# Altium PCB PCB1.PcbDoc
Units mm, origin at the board's own origin, x right, y up, seen from the top; angles counter-clockwise.
Board outline 33.53 x 33.53 mm, 4 copper layers (Top Layer, Layer 1, Layer 2, Bottom Layer), stack 0.603 mm thick; 79 components, 50 nets, 254 pads, 63 vias.
Unrouted connection lines stored in the file: 60.
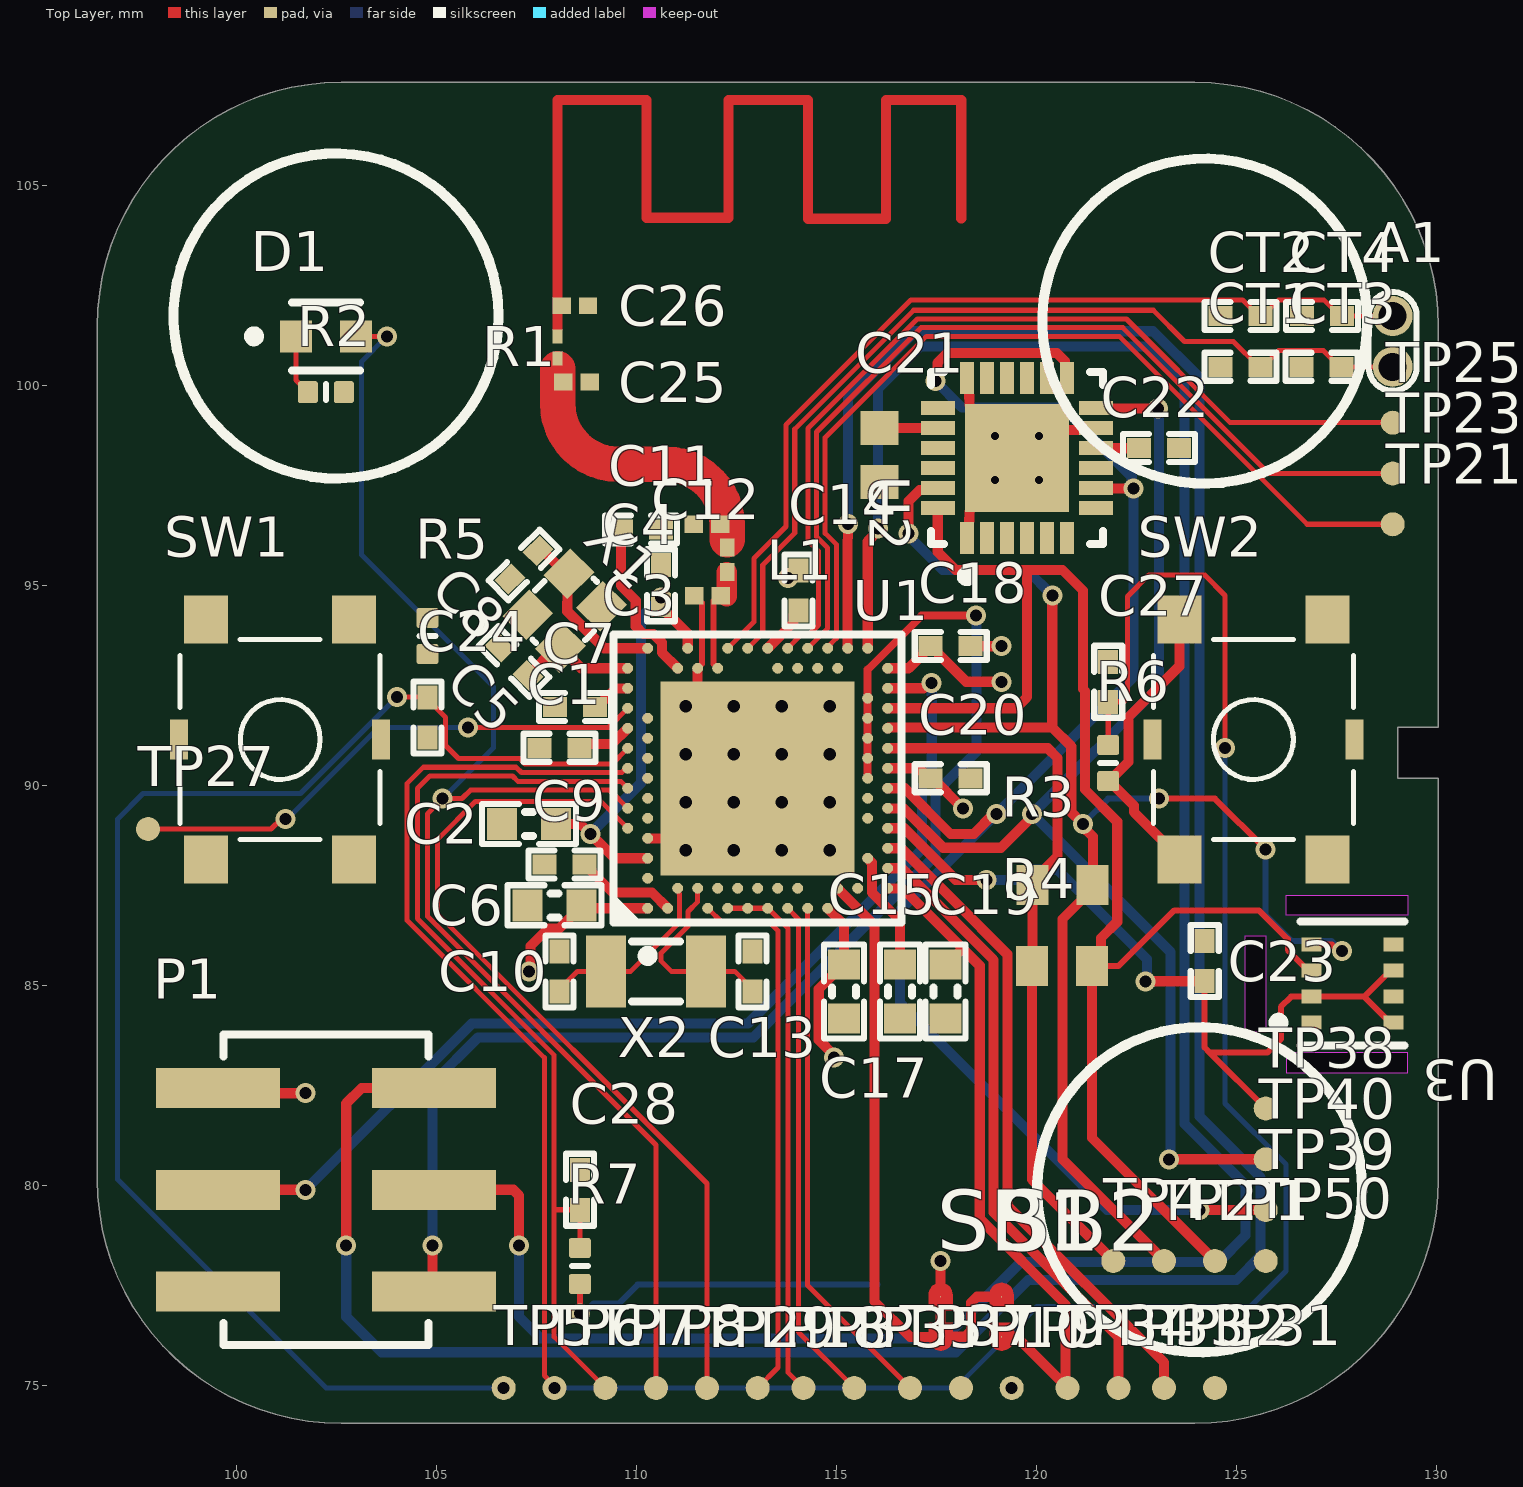
[diagram p0: Top Layer view]
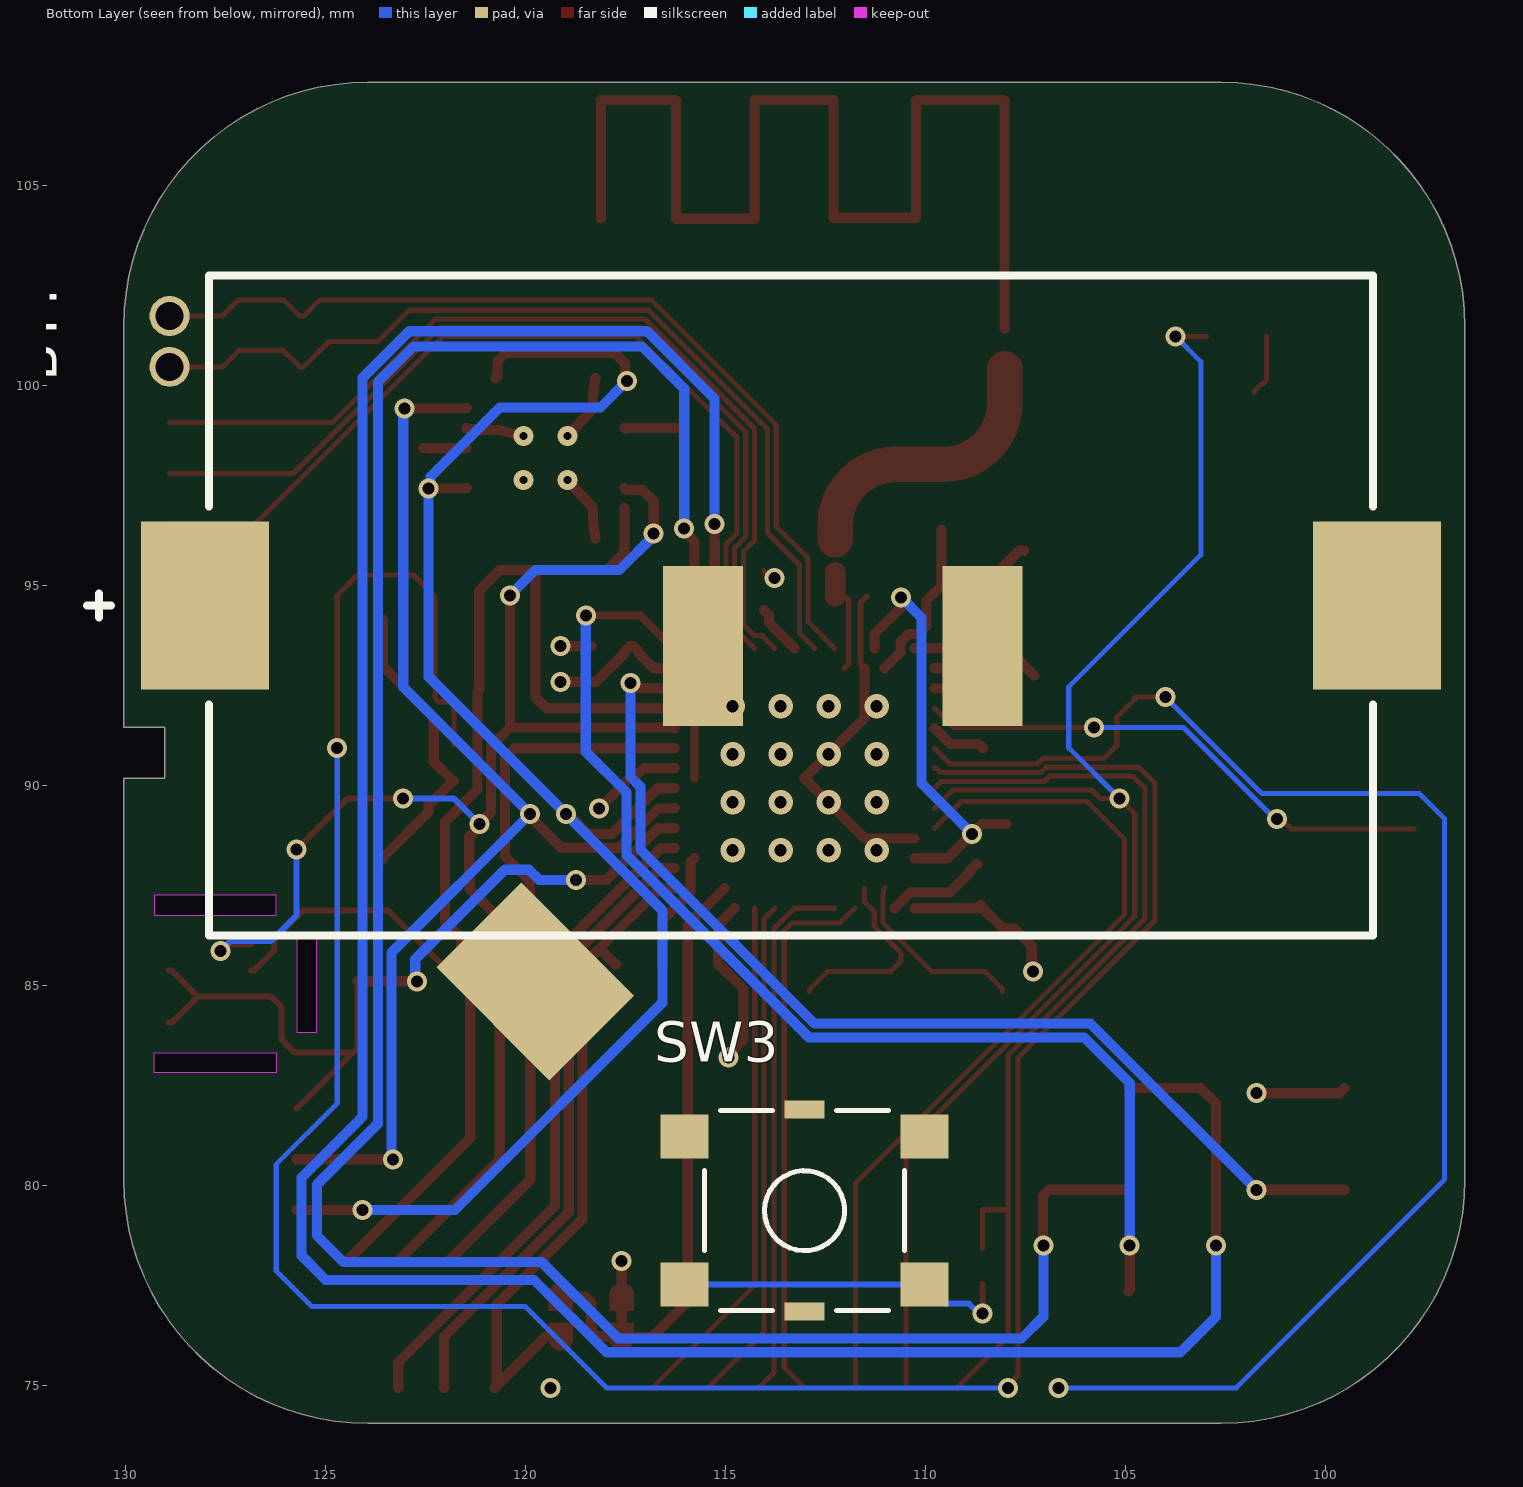
[diagram p1: Bottom Layer view, seen from below]
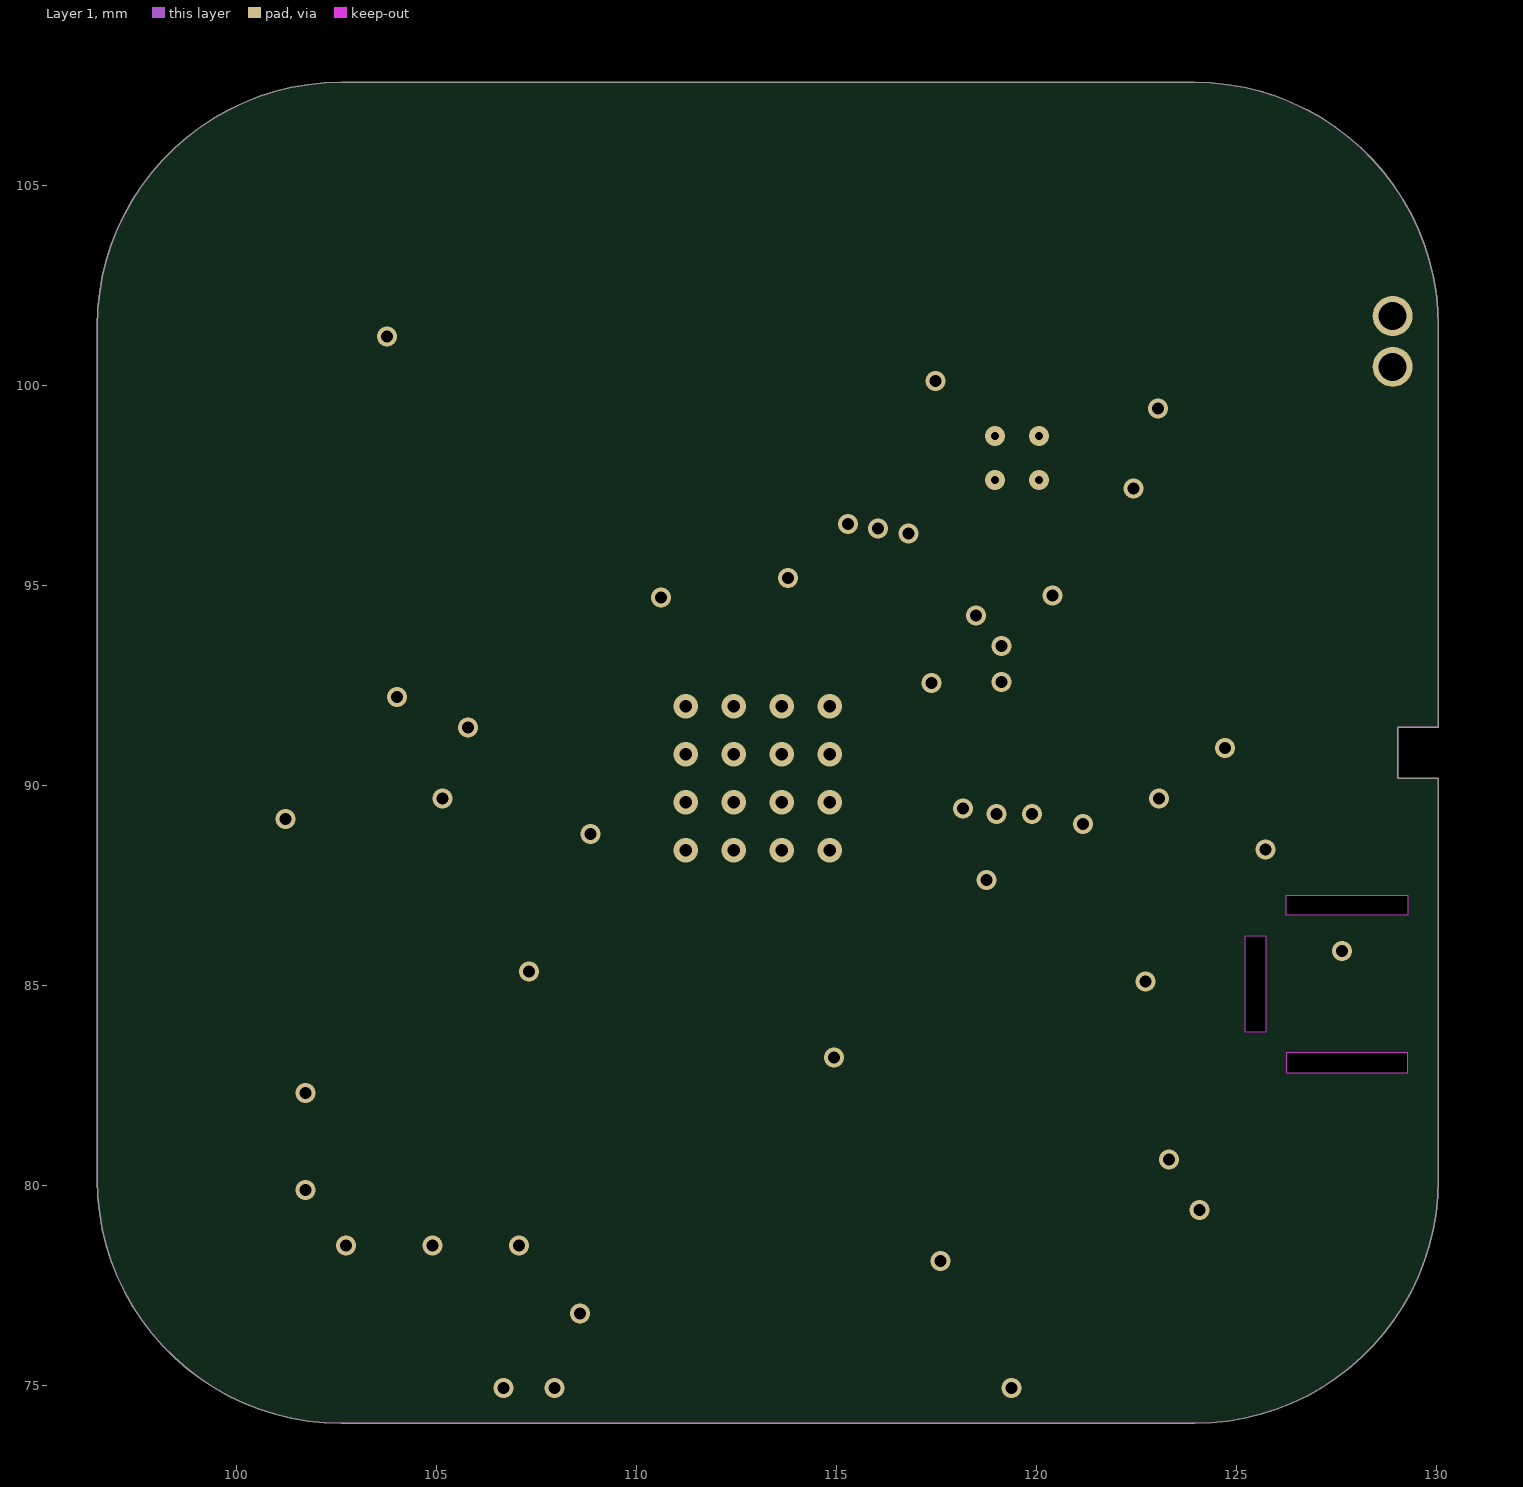
[diagram p2: Layer 1]
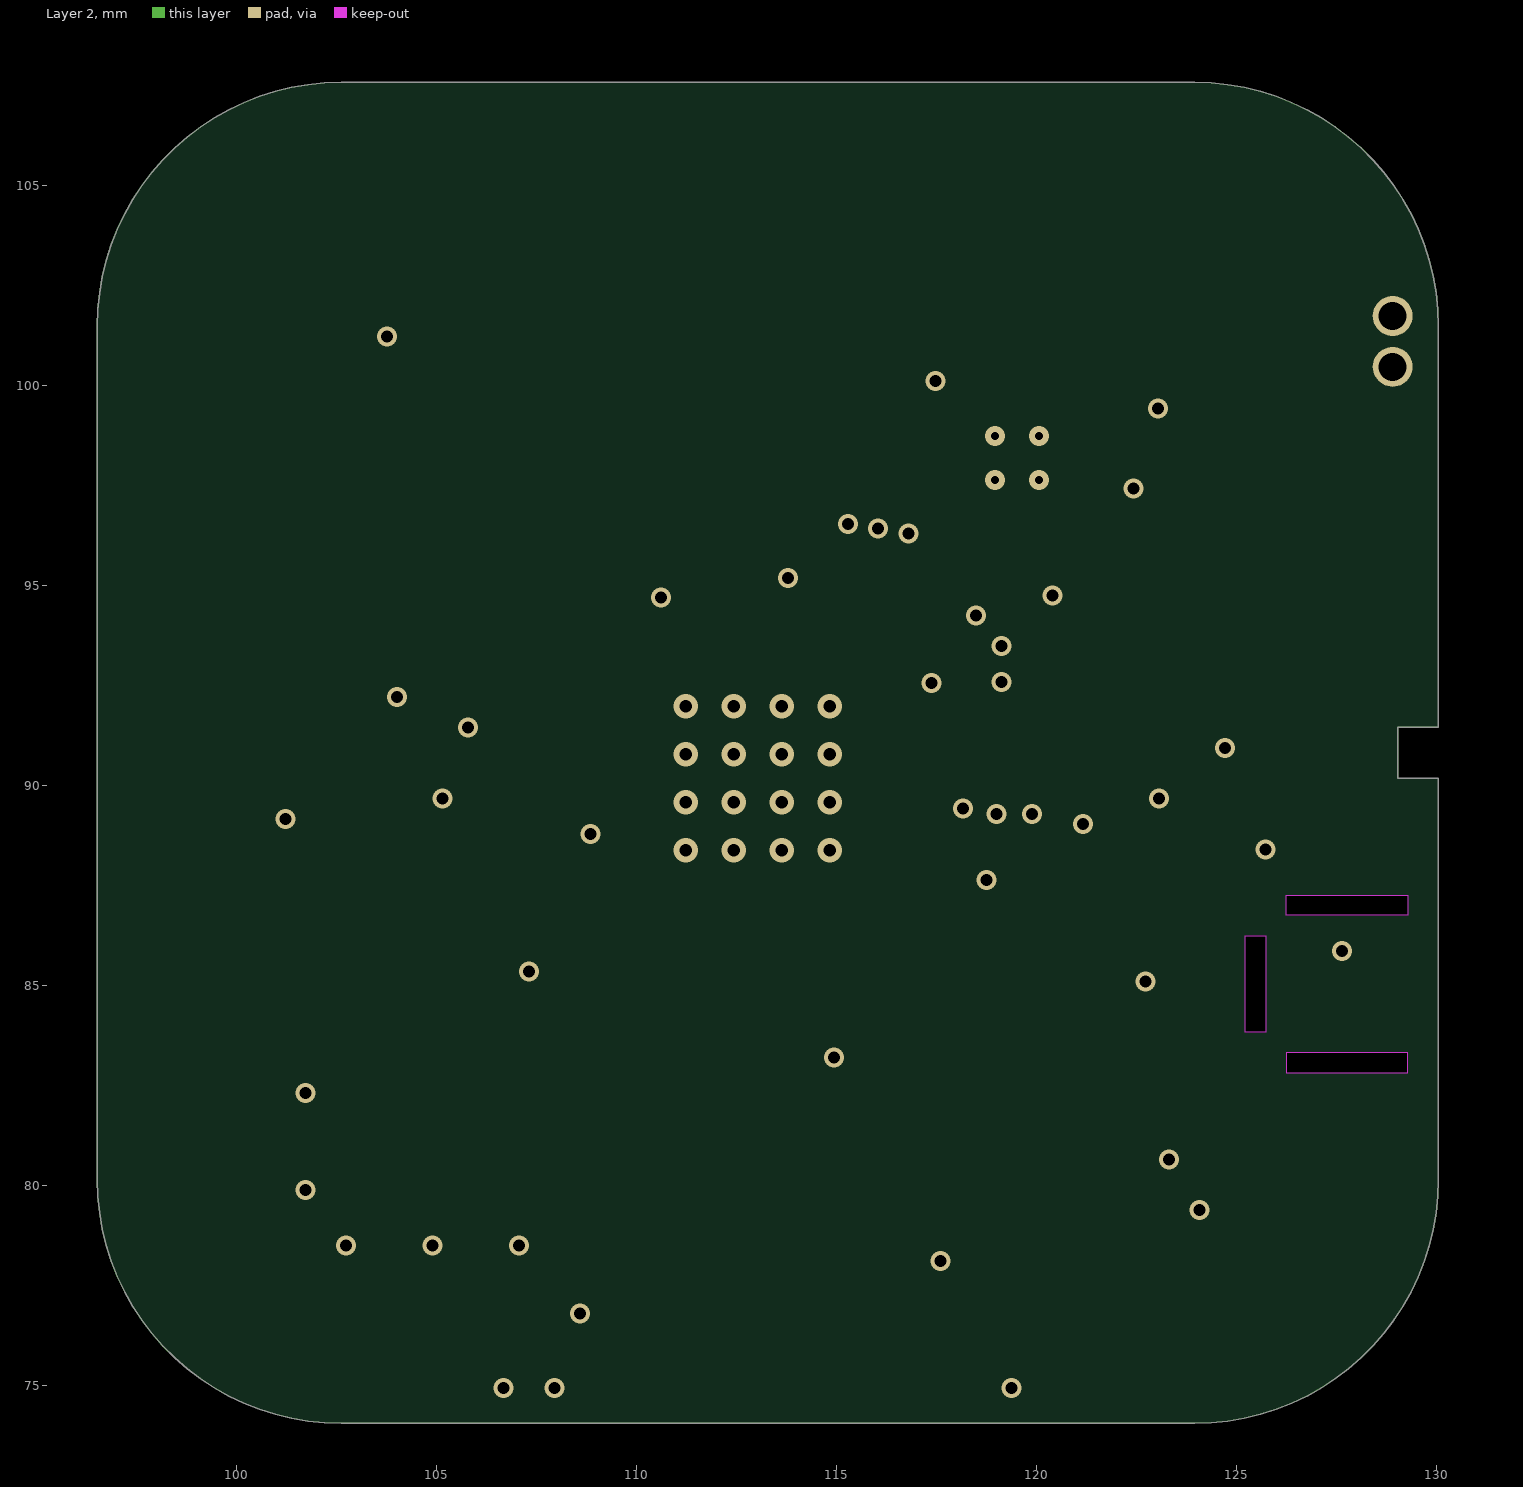
[diagram p3: Layer 2]
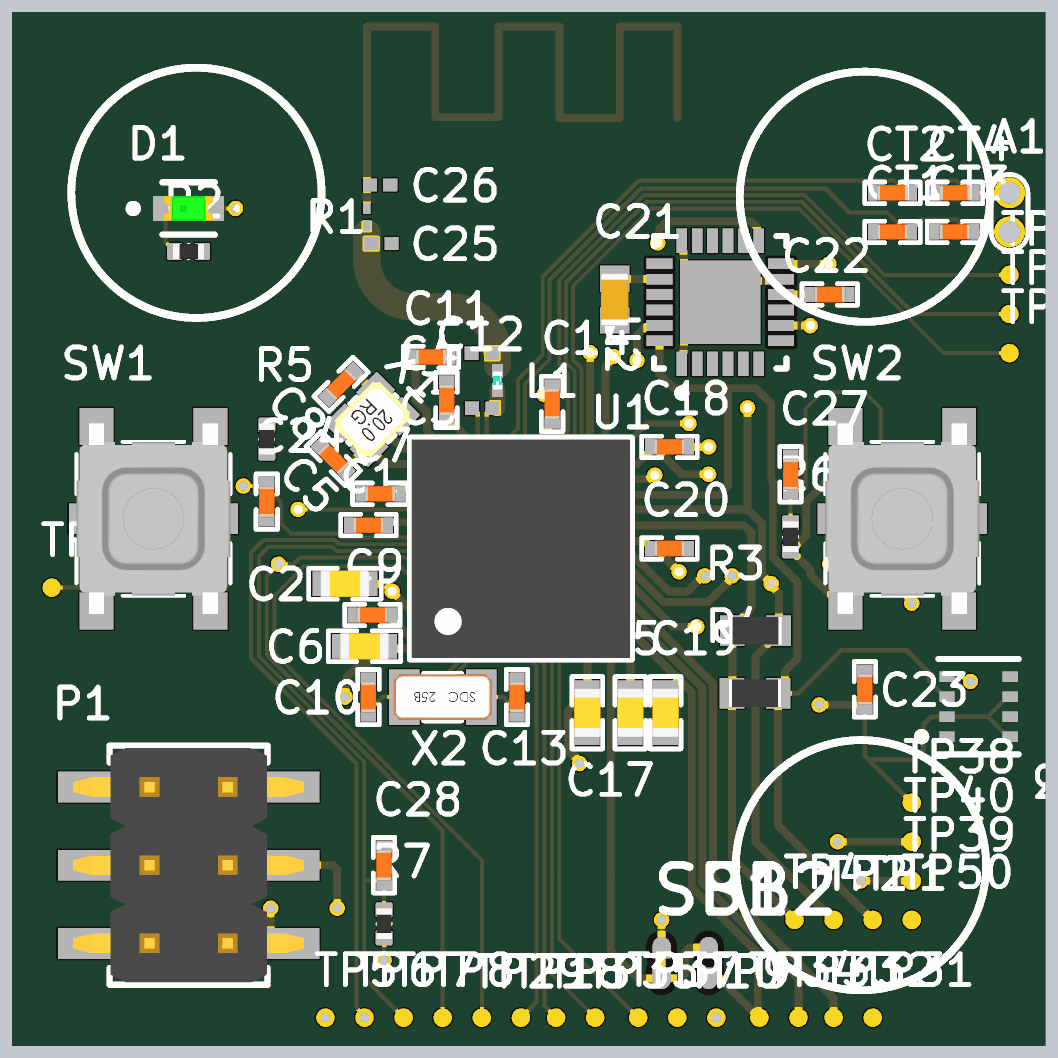
[diagram p4: 3D render of the assembled board from above, using the file's embedded part models]

## Layer stack, top to bottom
Top Solder: solder mask 0.0102, Solder Resist, Dk 3.5
Top Layer: signal copper 0.0356
Dielectric 2: prepreg 0.0711, PP-006, Dk 4.1
Layer 1: signal copper 0.035
Dielectric 1: dielectric 0.32, FR-4, Dk 4.8
Layer 2: signal copper 0.035
Dielectric 3: prepreg 0.0711, PP-006, Dk 4.1
Bottom Layer: signal copper 0.0356
Bottom Solder: solder mask 0.0102, Solder Resist, Dk 3.5

## Board outline
96.52,80.137 96.52,101.473 cw(c102.616,101.473) 102.616,107.569 123.952,107.569 cw(c123.952,101.473) 130.048,101.473 130.048,91.44 129.032,91.44 129.032,90.17 130.048,90.17 130.048,80.137 cw(c123.952,80.137) 123.952,74.041 102.616,74.041 cw(c102.616,80.137)
cut-out: 125.73,86.233 125.73,83.82 125.222,83.82 125.222,86.233
cut-out: 129.286,83.312 126.238,83.312 126.238,82.804 129.286,82.804
cut-out: 129.286,86.741 126.238,86.741 126.238,87.249 129.286,87.249

## Design rules (kind name [scope] priority, off if disabled: settings)
Clearance [All] p1: gap=0.254 ignorepadtopadclearanceinfootprint=TRUE except(0: Arc-Hole Track-Hole SMDPad-Hole THPad-Hole Via-Hole Fill-Hole Poly-Hole Region-Hole Text-Hole; 0.09: Arc-Arc Arc-Track Arc-SMDPad Track-Track Track-SMDPad; 0.127: SMDPad-SMDPad)
MinimumSolderMaskSliver [All] p1: minsoldermaskwidth=0.2
PolygonConnect [All] p1: connectstyle=Relief reliefconductorwidth=0.254 reliefentries=4 polygonreliefangle="90 Angle" airgapwidth=0.254
RoutingVias [All] p1: holewidth=0.3 width=0.5 viastyle="Through Hole" minholewidth=0.2 minwidth=0.4 maxholewidth=0.711 maxwidth=1.27
SilkToSilkClearance [All] p1 off: silktosilkclearance=0.254
SilkToSolderMaskClearance [IsPad] p1: minsilkscreentomaskgap=0.15 clearancetoexposedcopper=TRUE
SolderMaskExpansion [All] p1: expansion=0.05 istentingtop=FALSE
Width [All] p1: maxlimit=10 minlimit=0.09 preferedwidth=0.254
27 further rules are at their usual default settings.

## Components (designator, comment, footprint, x,y, rotation, side; value= is the part's Value field where it differs from the comment)
A1 "NFC Antenna" TP_2x1mm_TH 128.905,101.092 r180 top
BT? "BU2032SM-BT-GTR; BS-06-B4AK001" FP-BU2032SM-BT-GTR-MFG 113.366,94.488 r180 bottom locked
C1 "N.C." CAPC1005X04L 108.077,90.932 r180 top
C2 "1.0µF" CAPC1608X06L 107.315,89.027 r0 top
C3 "0.8pF" CAPC0603X28X15NL05T05 111.775,94.728 r0 top locked
C4 "0.5pF" CAPC0603X28X15NL05T05 111.76,96.52 r0 top
C5 "12pF" CAPC1005X04L 106.934,93.091 r135 top
C6 "1.0µF" CAPC1608X06L 107.95,86.995 r0 top
C7 "100nF" CAPC1005X04L 108.458,91.948 r0 top
C8 "12pF" CAPC1005X04L 107.188,95.504 r225 top
C9 "100nF" CAPC1005X04L 108.204,88.011 r180 top
C10 "12pF" CAPC1005X04L 108.077,85.344 r270 top
C11 "100pF" CAPC1005X04L 110.109,96.393 r0 top
C12 "N.C." CAPC1005X04L 110.617,94.996 r270 top
C13 "12pF" CAPC1005X04L 112.903,85.344 r270 top
C14 "820pF" CAPC1005X04L 114.046,94.869 r270 top
C15 "4.7µF" CAPC1608X06L 115.189,84.836 r90 top
C17 "4.7µF" CAPC1608X06L 116.586,84.836 r90 top
C18 "100nF" CAPC1005X04L 117.856,93.472 r180 top
C19 "4.7µF" CAPC1608X06L 117.729,84.836 r90 top
C20 "100nF" CAPC1005X04L 117.856,90.17 r180 top
C21 "2.2nF 50V" CAPC1608X90X35NL10T15 116.078,98.258 r90 top
C22 "100nF" CAPC1005X04L 123.063,98.425 r180 top
C23 "100nF" CAPC1005X04L 124.206,85.598 r90 top
C24 "100nF" CAPC1005X04L 104.775,91.694 r90 top
C25 "N.C." CAPC0603X33X15NL03T05 108.499,100.077 r180 top locked
C26 "1.5pF" CAPC0603X33X15NL03T05 108.458,101.981 r180 top locked
C27 "100nF" CAPC1005X04L 121.793,92.583 r270 top
C28 "100nF" CAPC1005X04L 108.585,79.883 r270 top
CT1 "Antenna dependent" CAPC1005X04L 125.103,100.457 r180 top
CT2 "Antenna dependent" CAPC1005X04L 125.103,101.727 r0 top
CT3 "Antenna dependent" CAPC1005X04L 127.127,100.457 r180 top
CT4 "Antenna dependent" CAPC1005X04L 127.135,101.727 r0 top
D1 "LTST-C190GKT" FP-LTST-C190GKT-MFG 102.235,101.219 r0 top
L1 "4.7nH" FP-LQP03TG_02-IPC_B 112.268,95.631 r90 top locked
P1 "DEBUG" 61000621121 102.235,79.883 r270 top
R1 "0" RESC0603X26X15LL03T05 108.026,100.944 r90 top locked
R2 "Resistor 1K +/-5 % 0402 63 mW" RESC0402(1005)_L 102.235,99.822 r180 top value=1k
R3 "Resistor 4k7 +/-1% 0603 100 mW" RESC1608X55X25ML10T15 120.65,87.503 r180 top value=4.7k
R4 "Resistor 4k7 +/-1% 0603 100 mW" RESC1608X55X25ML10T15 120.638,85.471 r180 top value=4.7k
R5 "Resistor 1K +/-5 % 0402 63 mW" RESC0402(1005)_L 104.775,93.726 r270 top value=1k
R6 "Resistor 1K +/-5 % 0402 63 mW" RESC0402(1005)_L 121.793,90.551 r90 top value=1k
R7 "Resistor 1K +/-5 % 0402 63 mW" RESC0402(1005)_L 108.585,77.978 r90 top value=1k
SB1 "Copy of Solder Bridge connected" CAPC1005X06N#1 117.602,76.708 r90 top net-tie
SB2 "Solder Bridge not connected" CAPC1005X06N#2 119.126,76.708 r90 top
SW1 "431181015816" 431181015816 101.092,91.138 r90 top locked
SW2 "431181015816" 431181015816 125.421,91.138 r270 top locked
SW3 "431181015816" 431181015816 113.03,79.36 r180 bottom locked
TP1 "TPAD6R" TP06R 124.46,78.105 r180 top
TP2 "TPAD6R" TP06R 123.19,78.105 r180 top
TP3 "TPAD6R" TP06R 114.173,74.93 r90 top
TP4 "TPAD6R" TP06R 121.92,78.105 r90 top
TP5 "TPAD6R" TP06R 106.68,74.93 r90 top
TP6 "TPAD6R" TP06R 107.95,74.93 r90 top
TP7 "TPAD6R" TP06R 109.22,74.93 r90 top
TP8 "TPAD6R" TP06R 110.49,74.93 r90 top
TP9 "TPAD6R" TP06R 119.38,74.93 r90 top
TP10 "TPAD6R" TP06R 118.11,74.93 r90 top
TP18 "TPAD6R" TP06R 113.03,74.93 r0 top
TP21 "TPAD6R" TP06R 128.905,96.52 r90 top
TP23 "TPAD6R" TP06R 128.905,97.79 r270 top
TP25 "TPAD6R" TP06R 128.905,99.06 r270 top
TP27 "TPAD6R" TP06R 97.79,88.9 r90 top
TP29 "TPAD6R" TP06R 111.76,74.93 r90 top
TP31 "TPAD6R" TP06R 124.46,74.93 r90 top
TP32 "TPAD6R" TP06R 123.19,74.93 r90 top
TP33 "TPAD6R" TP06R 122.047,74.93 r90 top
TP34 "TPAD6R" TP06R 120.777,74.93 r90 top
TP35 "TPAD6R" TP06R 115.443,74.93 r90 top
TP37 "TPAD6R" TP06R 116.84,74.93 r90 top
TP38 "TPAD6R" TP06R 125.73,81.915 r90 top
TP39 "TPAD6R" TP06R 125.73,79.375 r90 top
TP40 "TPAD6R" TP06R 125.73,80.645 r90 top
TP50 "TPAD6R" TP06R 125.73,78.105 r90 top
U1 "nRF52840-QIAA" AQFN50P700X700X85_HS-74N 113.03,90.17 r90 top
U2 "MPU-6050" IS-QFN-24_V 119.507,98.171 r90 top
U3 "BME280" FP-BME280-MFG 127.898,85.034 r180 top
X1 "32MHz" BT-XTAL_2016 108.204,94.361 r225 top
X2 "32.768kHz" XTAL_3215 110.49,85.344 r180 top

## Footprints (in the part's own frame and the unit in brackets; to place one, negate y for a bottom-side part, rotate by r counter-clockwise, add the part's x,y. Pads: shape width x height; smd on the part's side, far side on the other; paste and mask are expansions set on the pad)
61000621121 [mm] "Pin Header, pitch 2.54 mm, SMD, Vertical, dual row, 6p"
  rect 1x3.1 smd: 1(-2.54,-2.7) 2(-2.54,2.7) 3(0,-2.7) 4(0,2.7) 5(2.54,-2.7) 6(2.54,2.7)
  silkscreen extent -3.89,-2.56 3.89,2.57, body extent -3.81,-3.75 3.81,3.75, height 9.62
431181015816 [mm] "5*5mm vertical type, SMD, height 1.5mm, black actuator, 160gf, Grounded Terminal, T&R"
  rect 1.2x1.1 smd: 1(-3,-1.85) 2(-3,1.85) 3(3,-1.85) 4(3,1.85)
  rect 1x0.45 smd: 5(0,-2.525) 6(0,2.525)
  silkscreen extent -2.5,-2.5 2.5,2.5, body extent -3.1,-2.5 3.1,2.5, height 1.49
AQFN50P700X700X85_HS-74N [mm]
  rect 4.85x4.85 smd mask+0.05: 74(0,0)
  round 0.275 smd paste+0.012 mask+0.05: A8(-1.25,3.25) A10(-0.75,3.25) A12(-0.25,3.25) A14(0.25,3.25) A16(0.75,3.25) A18(1.25,3.25) A20(1.75,3.25) A22(2.25,3.25) A23(2.75,3.25) AA24(3.25,-2.25) AB2(-2.75,-2.5) AC5(-2,-2.75) AC9(-1,-2.75) AC11(-0.5,-2.75) AC13(0,-2.75) AC15(0.5,-2.75) AC17(1,-2.75) AC19(1.5,-2.75) AC21(2,-2.75) AC24(3.25,-2.75) AD2(-2.75,-3.25) AD4(-2.25,-3.25) AD6(-1.75,-3.25) AD8(-1.25,-3.25) AD10(-0.75,-3.25) AD12(-0.25,-3.25) AD14(0.25,-3.25) AD16(0.75,-3.25) AD18(1.25,-3.25) AD20(1.75,-3.25) AD22(2.25,-3.25) AD23(2.75,-3.25) B1(-3.25,2.75) B3(-2.5,2.75) B5(-2,2.75) B7(-1.5,2.75) B9(-1,2.75) B11(-0.5,2.75) B13(0,2.75) B15(0.5,2.75) B17(1,2.75) B19(1.5,2.75) B24(3.25,2.75) C1(-3.25,2.25) D2(-2.75,2) D23(2.75,2) E24(3.25,1.75) F2(-2.75,1.5) F23(2.75,1.5) G1(-3.25,1.25) H2(-2.75,1) H23(2.75,1) J1(-3.25,0.75) J24(3.25,0.75) K2(-2.75,0.5) L1(-3.25,0.25) L24(3.25,0.25) M2(-2.75,0) N1(-3.25,-0.25) N24(3.25,-0.25) P2(-2.75,-0.5) P23(2.75,-0.5) R1(-3.25,-0.75) R24(3.25,-0.75) T2(-2.75,-1) T23(2.75,-1) U1(-3.25,-1.25) U24(3.25,-1.25) V23(2.75,-1.5) W1(-3.25,-1.75) W24(3.25,-1.75) Y2(-2.75,-2) Y23(2.75,-2)
  silkscreen extent -4.56,-3.6 3.6,3.6, body extent -3.55,-3.55 3.55,3.55, height 0.85
BT-XTAL_2016 [mm]
  rect 0.95x0.85 smd: 1(-0.725,-0.575) 2(0.725,-0.575) 3(0.725,0.575) 4(-0.725,0.575)
  silkscreen extent -1.08,-0.88 1.08,0.88, body extent -1.05,-0.85 1.05,0.85, height 0.56
CAPC0603X28X15NL05T05 [mm] "Chip Capacitor, 2-Leads, Body 0.60x0.33mm, IPC Medium Density"
  rect 0.46x0.44 smd: 1(-0.33,0) 2(0.33,0)
  body extent -0.32,-0.19 0.33,0.19, height 0.28
CAPC0603X33X15NL03T05 [mm] "Chip Capacitor, 2-Leads, Body 0.60x0.30mm, IPC Medium Density"
  rect 0.46x0.42 smd: 1(-0.33,0) 2(0.33,0)
  body extent -0.31,-0.17 0.32,0.16, height 0.33
CAPC1005X04L [mm]
  rect 0.6x0.5 smd: 1(-0.5,0) 2(0.5,0)
  silkscreen extent -0.9,-0.35 0.9,0.35, body extent -0.51,-0.25 0.51,0.25, height 0.5
CAPC1005X06N#1 [mil] "Chip Capacitor, 2-Leads, Body 1,00x0,50mm, IPC Medium Density"
  round 1 smd mask+7.87: 1(-19.68,0) 2(19.68,0)
  Top Layer region: -21.65,-11.81 -26.78,-10.64 -30.89,-7.36 -33.17,-2.63 -33.17,2.63 -30.89,7.36 -26.78,10.64 -21.65,11.81 -21.65,11.81 -5.91,11.81 -5.91,-11.81
  Top Layer region: 21.65,11.81 26.78,10.64 30.89,7.36 33.17,2.63 33.17,-2.63 30.89,-7.36 26.78,-10.64 21.65,-11.81 21.65,-11.81 5.91,-11.81 5.91,11.81
  Top Layer lines w10: -7.87,0 7.87,0
CAPC1005X06N#2 [mil] "Chip Capacitor, 2-Leads, Body 1,00x0,50mm, IPC Medium Density"
  round 1 smd mask+7.87: 1(-19.68,0) 2(19.68,0)
  Top Layer region: 21.65,11.81 26.78,10.64 30.89,7.36 33.17,2.63 33.17,-2.63 30.89,-7.36 26.78,-10.64 21.65,-11.81 21.65,-11.81 5.91,-11.81 5.91,11.81
  Top Layer region: -21.65,-11.81 -26.78,-10.64 -30.89,-7.36 -33.17,-2.63 -33.17,2.63 -30.89,7.36 -26.78,10.64 -21.65,11.81 -21.65,11.81 -5.91,11.81 -5.91,-11.81
CAPC1608X06L [mm]
  rect 0.75x0.8 smd: 1(-0.675,0) 2(0.675,0)
  silkscreen extent -1.17,-0.5 1.17,0.5, body extent -0.8,-0.43 0.8,0.43, height 0.8
CAPC1608X90X35NL10T15 [mm] "Chip Capacitor, 2-Leads, Body 1.7x0.9mm, IPC Medium Density"
  rect 0.85x0.95 smd: 1(-0.675,0) 2(0.675,0)
  body extent -0.85,-0.45 0.85,0.45, height 0.9
FP-BME280-MFG [mm]
  rect 0.5x0.35 smd paste+0 mask+0: 1(1.025,0.975) 2(1.025,0.325) 3(1.025,-0.325) 4(1.025,-0.975) 5(-1.025,-0.975) 6(-1.025,-0.325) 7(-1.025,0.325) 8(-1.025,0.975)
  silkscreen extent -1.3,-1.55 1.97,1.55
FP-BU2032SM-BT-GTR-MFG [mm]
  rect 3.2x4.2 smd paste+0 mask+0: 1(14.65,0) 2(-14.65,0)
  silkscreen extent -17.6,-8.25 14.55,8.25, body extent -15.93,-8 15.93,8, height 5.7
FP-LQP03TG_02-IPC_B [mm]
  rect 0.454x0.363 smd paste+0 mask+0: 1(-0.304,0) 2(0.304,0)
  body extent -0.68,-0.33 0.68,0.33, height 0.25
FP-LTST-C190GKT-MFG [mm]
  rect 0.8x0.8 smd paste+0 mask+0: 1(-0.75,0) 2(0.75,0)
  silkscreen extent -1.92,-0.85 0.85,0.85, body extent -1.25,-0.55 1.25,0.55, height 0.25
IS-QFN-24_V [mm] "QFN, 24-Leads, Body 4x4mm, Pitch 0.5mm, Thermal Pad 2.7x2.6mm"
  rect 0.8x0.35 smd: 1(-2,1.25) 2(-2,0.75) 3(-2,0.25) 4(-2,-0.25) 5(-2,-0.75) 6(-2,-1.25) 13(2,-1.25) 14(2,-0.75) 15(2,-0.25) 16(2,0.25) 17(2,0.75) 18(2,1.25)
  rect 0.35x0.85 smd mask+0.102: 7(-1.25,-1.975) 8(-0.75,-1.975) 9(-0.25,-1.975) 10(0.25,-1.975) 11(0.75,-1.975) 12(1.25,-1.975) 19(1.25,1.975) 20(0.75,1.975) 21(0.25,1.975) 22(-0.25,1.975) 23(-0.75,1.975) 24(-1.25,1.975)
  rect 2.7x2.6 smd: 25(0,0)
  silkscreen extent -3.07,-2.15 2.15,2.15, body extent -2,-2 2,2, height 0.95
RESC0402(1005)_L [mm] "Chip Resistor, Body 1.0x0.5mm, IPC High Density"
  rrect25% 0.5x0.55 smd: 1(-0.45,0) 2(0.45,0)
  silkscreen extent 0,-0.2 0,0.2, body extent -0.5,-0.25 0.5,0.25, height 0.3
RESC0603X26X15LL03T05 [mm] "Chip Resistor, 2-Leads, Body 0.60x0.30mm, IPC High Density"
  rect 0.35x0.25 smd: 1(-0.275,0) 2(0.275,0)
  body extent -0.32,-0.16 0.31,0.17, height 0.26
RESC1608X55X25ML10T15 [mm] "Chip Resistor, 2-Leads, Body 1.70x0.90mm, IPC Low Density"
  rect 0.8x1 smd: 1(-0.75,0) 2(0.75,0)
  body extent -0.85,-0.45 0.85,0.45, height 0.55
TP06R [mm] "Testpoint, round, d=0.6mm"
  round 0.6 smd paste-1: 1(0,0)
TP_2x1mm_TH [mm]
  round 1 hole 0.7: 1(0,-0.635) 2(0,0.635)
  silkscreen extent -0.6,-1.23 0.6,1.23
XTAL_3215 [mm]
  rect 1x1.8 smd: 1(-1.25,0) 2(1.25,0)
  silkscreen extent -0.6,-0.75 0.6,0.75, body extent -1.6,-0.75 1.6,0.75, height 0.81

## Part data
A1: library part NFC_ANT_TP, Footprint Doc=TP_2x1mm_TH, LatestRevisionDate=2016-02-23, Pad Count=2, Part Number=NFC_ANT_TP, Published=2016-02-23
BT?: library part CMP-136216-000002-1, "BATTERY HOLDER COIN 20MM SMD", Case/Package=SMD/SMT, Max Operating Temperature=280°C, Min Operating Temperature=-40°C, Package Quantity=400, Mount="Surface Mount", Number of Cells=1, Termination=SMD/SMT
C1 C12: library part C0402-N.C., "Not mounted", Assembly="Not mounted", Footprint Doc=0402, LatestRevisionDate=2009-05-08, Pad Count=2, Part Number=C0402-N.C., Published=2009-05-08
C2 C6: library part C0603-1µ0, "Capacitor, X7R, ±10%", Footprint Doc=0603, LatestRevisionDate=2013-06-05, Pad Count=2, Part Number=C0603-1µ0, Published=2009-05-08
C3: library part CMP-2010-00088-1, "02013J0R8PBWTR", Manufacturer="AVX Interconnect / Elco", Part Number=02013J0R8PBWTR
C4: library part CMP-2010-00076-1, "02013J0R5PBSTR", Manufacturer="AVX Interconnect / Elco", Part Number=02013J0R5PBSTR
C5 C8 C10 C13: library part C0402-12p, "Capacitor, NP0, ±2%", Footprint Doc=0402, LatestRevisionDate=2011-05-11, Pad Count=2, Part Number=C0402-12p, Published=2009-05-08
C7 C9 C18 C20 C22 C23 C24 C27 C28: library part C0402-100n, "Capacitor, X7R, ±10%", Footprint Doc=0402, LatestRevisionDate=2009-11-23, Pad Count=2, Part Number=C0402-100n, Published=2009-05-08
C11: library part C0402-100p, "Capacitor, NP0, ±5%", Footprint Doc=0402, LatestRevisionDate=2009-05-08, Pad Count=2, Part Number=C0402-100p, Published=2009-05-08
C14: library part C0402-820p, "Capacitor, NP0, ±5%", Assembly="Not required for Fxx and later", Footprint Doc=0402, LatestRevisionDate=2009-05-08, Pad Count=2, Part Number=C0402-820p, Published=2009-05-08
C15 C17 C19: library part C0603-4µ7-10V-X7S, "Capacitor, X7S, ±10%", Footprint Doc=0603, LatestRevisionDate=2016-08-15, Pad Count=2, Part Number=C0603-4µ7-10V-X7S, Published=2016-08-15
C21: library part CMP-2006-02908-5, "Chip Capacitor, 2.2 nF, +/- 10%, 50 V, -55 to 125 degC, 0603 (1608 Metric), RoHS, Tape and Reel", Manufacturer=Murata, Max Operating Temperature="125 degC", Min Operating Temperature="-55 degC", Package Quantity=4000, Voltage Rating="50 V", ComponentLink1Description="Manufacturer URL", ComponentLink1URL=http://www.murata.com/, ComponentLink2Description=Datasheet, ComponentLink2URL=http://search.murata.co.jp/Ceramy/image/img/A01X/G101/ENG/GRM188R71H222KA01-01.pdf, DatasheetVersion=02/2016, Height="0.8 mm", Lead Pitch="4 mm", Length="1.6 mm", Mount="Surface Mount", Mounting Technology="Surface Mount", PackageDescription="2-Pin Surface Mount Device, Body 1.6 x 0.8 mm", PackageReference=0603, Packaging="Tape and Reel", Pins=2, REACH SVHC="No SVHC", RoHSCompliant=true
C25 C26: library part CMP-1033-00061-2, Manufacturer="AVX Interconnect / Elco", Part Number=02013A1R5CAT2A
CT1 CT2 CT3 CT4: library part C0402-TBD, "Capacitor, NP0, ±5%", Footprint Doc=0402, LatestRevisionDate=2010-12-21, Pad Count=2, Part Number=C0402-TBD, Published=2010-12-21
D1: library part CMP-22017-000005-2, "LED GREEN CLEAR CHIP SMD", Case Code (Imperial)=0603, Case Code (Metric)=1608, Color=Green, Forward Current=30mA, Forward Voltage=2.1V, Lens Color=Colorless, Max Operating Temperature=85°C, Min Operating Temperature=-55°C, Package Quantity=1, Power Dissipation=100mW, Reverse Voltage=5V, Test Current=10mA, Voltage=2V, Case/Package=0603, Depth=0.8mm, Dominant Wavelength=569nm, Height=0.8mm, Illumination Color=Green, Lead Free="Lead Free", Length=1.6mm, Lens Style=Clear, Lens Transparency=Clear, Luminous Intensity=6mcd, Mount="Surface Mount", Number of Elements=1, Number of LEDs=1, Number of Pins=2, Packaging="Tape and Reel", Power Rating=100mW, Radiation Hardening=No, Viewing Angle=130°, Wavelength=565nm, Width=0.8mm
L1: library part CMP-006-00021-1, "Inductor RF Chip Thin Film 4.3nH 3% 500MHz 14Q-Factor 350mA 400mOhm DCR 0201 Paper T/R"
P1: library part CMP-1502-01024-1, "SMT Vertical Pin Header WR-PHD, Pitch 2.54 mm, Dual Row, 6 pins", Contact Resistance=20mOhm, Manufacturer="Wurth Elektronik", Operating Temperature=-40to125degC, Package Reference=61000621121, Rated Current=3A, Withstanding Voltage=500VAC, Working Voltage=250VAC, Datasheet URL=https://katalog.we-online.de/em/datasheet/6100xx21121.pdf, Gender=Male, Manufacturer URL=http://www.we-online.de, Mounting Technology=SMT, Orientation=Vertical, Packaging=Tube, Part Number=61000621121, Pin Number=6, Pitch=2.54mm, Publisher=WurthElektronik, Row Number=Dual
R1: library part CMP-2004-02624-1, "ERJ-1GE0R00C", Manufacturer=Panasonic, Part Number=ERJ-1GE0R00C
R2 R5 R6 R7: library part CMP-009-00157-3, "Chip Resistor, 1 kOhms, +/-5 %, 63 mW, -55 to 155 degC, 0402", Case/Package=0402, Max Operating Temperature=155°C, Min Operating Temperature=-55°C, Power=63mW, Tolerance=5%, Pins=2
R3 R4: library part CMP-009-00031-5, "Chip Resistor, 4.7 KOhm, +/- 1%, 0.1 W, -55 to 155 degC, 0603 (1608 Metric)", Case/Package=0603, Max Operating Temperature=155°C, Min Operating Temperature=-55°C, Power=100mW, Tolerance=1%, Mounting Technology=SM, Pins=2, RoHS Compliant=True
SB1: library part CMP-001-0001-5, "Solder Bridge Jumper connected"
SB2: library part CMP-001-0000-3, "Solder Bridge Jumper not connected"
SW1 SW2 SW3: library part CMP-1457-00006-1, "WS-TASV SMD Tact Switch 5X5 mm with ground terminal", Manufacturer="Wuerth Elektronik", ComponentLink1Description="Manufacturer URL", ComponentLink1URL=http://www.we-online.com, ComponentLink2Description=Datasheet, ComponentLink2URL=http://katalog.we-online.de/em/datasheet/431181015816.pdf, NoPins=04, PackageReference=431181015816, PartNumber=431181015816
TP1 TP2 TP3 TP4 TP5 TP6 TP7 TP8 TP9 TP10 TP18 TP21 TP23 TP25 TP27 TP29 TP31 TP32 TP33 TP34 TP35 TP37 TP38 TP39 TP40 TP50: library part CMP-00028-00002-4, "0.6mm round", Pins=1
U1: "Multi-protocol Bluetooth Low Energy, IEEE 802.15.4, ANT and 2.4GHz proprietary system-on-chip", Footprint Doc=AQFN-73, LatestRevisionDate=2017-08-21, Pad Count=73, Part Number=nRF52840-QIAA, Published=2017-08-21
U2: library part CMP-1753-00002-2, "3-Axis Gyroscope, Accelerometer and a Digital Motion Processor(TM) (DMP), 2.375 to 3.46 V, -40 to 85 degC, 24-Pin QFN, RoHS, Tape and Reel", Manufacturer=InvenSense, Standard Package=5,000, Category=Sensors,Transducers, Datasheet URL=http://datasheet.octopart.com/MPU-6050-InvenSense-datasheet-14421344.pdf, Datasheet Version="Rev. 3.3, 05/2012", Dynamic Catalog=MPU-6000™Series, Family=Multifunction, Featured Product=MPU-60506-Axis,IntegratedI²CSolution, Manufacturer URL=http://www.invensense.com/, Online Catalog=MPU-6000™Series, Other Names="1428-1007-2 / MPU6050", Output Type=Digital, Sensor Type=MotionTracking, Unit PriceUSD=Digital
U3: library part CMP-2000-05073-3, "SENSOR PRESSURE HUMIDITY TEMP", Case/Package=LGA, Max Operating Temperature=85°C, Min Operating Temperature=-40°C, Accuracy=3%, Lead Free="Lead Free", Mount="Surface Mount", Number of Pins=8, Output Type=SPI, Packaging="Cut Tape", Response Time=1s, Sensor Type=Temperature
X1: library part XTAL_SMD2016_32MHz_8pF_General, "XTAL SMD 2016, 32MHz, Cl=8pF, Total Tol: ±40ppm", Footprint Doc=XTAL_2016, LatestRevisionDate=2016-08-19, Pad Count=4, Part Number=XTAL_SMD2016_32MHz_8pF_General, Published=2016-08-19
X2: library part XTAL_SMD3215_32.768kHz_9pF_General, "XTAL SMD 3215, 32.768kHz, Cl=9pF, Total Tol: ±50ppm", Footprint Doc=XTAL_3215, LatestRevisionDate=2016-08-19, Pad Count=2, Part Number=XTAL_SMD3215_32.768kHz_9pF_General, Published=2016-08-19

## Free pads (board coordinates)
  rect 2x4 smd far side: 2(108.585,93.472) 2(115.57,93.472)
  rect 4x3 smd far side rot 45: 2(119.761,85.09)

## Via types
v1: diameter 0.5, hole 0.3, Top Layer to Bottom Layer, 43 vias
v2: diameter 0.61, hole 0.305, Top Layer to Bottom Layer, 16 vias
v3: diameter 0.5, hole 0.2, Top Layer to Bottom Layer, 4 vias

## Nets (pads, with @x,y where several pads share a name; then routed paths per layer and width w, separated by ;. In a path a pad name is that pad's centre, name@x,y a point inside that pad or via, vN(x,y) a via of type N, cw(c..) or ccw(c..) an arc to the next point about the centre after c; other vN are vias at no path point)
ANT: C26.2 R1.2 | length 30.6
  Top Layer w0.254: 108.028,101.4 108.028,107.127 110.246,107.127 110.246,104.184 112.304,104.184 112.304,107.127 114.285,107.127 114.285,104.158 116.241,104.158 116.241,107.127 118.12,107.127 118.12,104.163
BME_EN: C23.1 TP38.1 U1.AD8 U3.2 U3.6 U3.8 | length 20.8
  Top Layer w0.15: C23.1 124.206,83.439 124.333,83.312 ; TP38.1 124.333,83.312 ; U3.8 128.848,84.059 128.198,84.709 ; U3.6 128.848,85.359 128.198,84.709 ; 124.333,83.312 125.773,83.312 126.111,83.65 126.111,84.455 126.365,84.709 U3.2 128.198,84.709
  Top Layer w0.254: U1.AD8 116.693,88.92 117.983,87.63 v1(118.745,87.63) ; v1(122.723,85.09) 122.727,85.094 124.202,85.094 C23.1
  Bottom Layer w0.254: v1(118.745,87.63) 119.666,87.63 119.92,87.884 120.523,87.884 122.762,85.645 122.762,85.129 v1(122.723,85.09)
BTN_A: C24.2 R5.2 TP5.1 U1.A16 | length 36.1
  Top Layer w0.127: v1(104.013,92.202) 104.767,92.202 C24.2 ; C24.2@104.775,92.144 105.225,91.694 105.225,90.99 105.552,90.663 107.078,90.663 107.213,90.529 109.389,90.529 U1.A16
  Bottom Layer w0.127: v1(104.013,92.202) 101.6,89.789 97.663,89.789 97.028,89.154 97.028,80.137 102.235,74.93 v1(106.68,74.93)
BTN_B: C27.2 R6.2 TP6.1 U1.A14 | length 66.5
  Top Layer w0.127: v1(107.95,74.93) 107.95,74.987 107.696,75.241 107.696,83.185 104.267,86.614 104.267,90.043 104.67,90.446 106.989,90.446 107.124,90.312 109.632,90.312 109.74,90.42 U1.A14 ; R6.2 C27.2 122.182,92.083 122.275,92.176 122.275,94.716 122.809,95.25 124.206,95.25 124.714,94.742 v1(124.714,90.932)
  Bottom Layer w0.127: v1(107.95,74.93) 117.983,74.93 120.015,76.962 125.349,76.962 126.238,77.851 126.238,80.518 124.714,82.042 v1(124.714,90.932)
BTN_P: C28.2 R7.2 TP7.1 U1.A12 | length 24
  Top Layer w0.127: R7.2 C28.2 107.942,79.383 ; TP7.1 107.942,76.208 107.942,79.383 ; U1.A12 109.606,90.095 107.034,90.095 106.899,90.229 104.834,90.229 104.521,89.916 104.521,86.667 107.942,83.246 107.942,79.383
D+: TP32.1 U1.AD6 | length 16.6
  Top Layer w0.254: U1.AD6 116.623,88.42 117.926,87.117 119.271,85.772 119.271,79.484 123.19,75.565 TP32.1
D-: TP33.1 U1.AD4 | length 15.6
  Top Layer w0.254: U1.AD4 116.636,87.92 118.927,85.629 118.927,79.32 122.047,76.2 TP33.1
DEC1: C9.1 U1.C1 | length 2.6
  Top Layer w0.254: C9.1 108.754,88.011 108.877,87.888 108.877,87.838 109.399,87.315 110.386,87.315 110.78,86.921 U1.C1
GND: BT?.1 C1.2 C2.1 C3.1 C4.1 C5.2 C6.1 C7.1 C8.2 C9.2 C10.1 C11.2 C12.1 C13.1 C14.1 C15.1 C17.1 C18.1 C19.1 C20.1 C21.1 C22.1 C23.2 C24.1 C25.1 C26.1 C27.1 C28.1 CT1.2 CT2.1 CT3.2 CT4.1 P1.5 pad.2@108.585,93.472 pad.2@115.57,93.472 R2.1 SW1.2 SW1.4 SW1.5 SW1.6 SW2.2 SW2.4 SW2.5 SW2.6 SW3.2 SW3.4 SW3.5 SW3.6 TP10.1 TP31.1 TP50.1 U1.74 U1.B7 U1.F23 U2.1 U2.11 U2.18 U2.25 U3.1 U3.5 U3.7 X1.2 X1.4 | length 14.4
  Top Layer w0.127: v1(113.786,95.173) 113.843,95.116 114.046,95.319 C14.1
  Top Layer w0.145: C3.1@111.47,94.722 111.635,94.556 111.635,93.025 U1.F23
  Top Layer w0.25: U1.B7 111.53,88.67 U1.74 ; U1.F23 111.53,91.67 U1.74@112.349,90.851
  Top Layer w0.254: U1.74@112.53,90.67 U1.74 ; U2.1 118.305,96.444 118.334,96.948 v3(118.957,97.621) ; U2.18 118.305,99.898 118.334,99.394 v3(118.957,98.721) ; C18.1 v1(119.13,93.472) ; v3(120.057,98.721) 120.68,98.873 121.184,98.873 U2.11
  other v2: 111.23,88.37 112.43,88.37 113.63,88.37 114.83,88.37 111.23,89.57 112.43,89.57 113.63,89.57 114.83,89.57 111.23,90.77 112.43,90.77 113.63,90.77 114.83,90.77 111.23,91.97 112.43,91.97 113.63,91.97 114.83,91.97
  other v3: 120.057,97.621
I2C_PULL: R3.2 R4.2 TP4.1 U1.AD16 | length 18
  Top Layer w0.254: U1.AD16 120.281,90.92 120.523,90.678 120.523,88.226 119.9,87.603 119.9,85.483 R4.2 119.888,80.137 TP4.1
IMU_EN: TP39.1 U1.AD12 U2.8 U2.13 | length 41.4
  Top Layer w0.254: U1.AD12 116.709,89.92 117.852,88.777 118.431,88.777 118.935,89.281 v1(118.999,89.281) ; v1(117.475,100.1) 117.522,100.147 117.522,100.551 117.772,100.801 120.509,100.801 120.709,100.601 120.709,100.219 U2.13 ; U2.8 121.488,97.415 122.422,97.415 v1(122.428,97.409) ; v1@124.082,79.376 TP39.1
  Bottom Layer w0.254: v1(117.475,100.1) 118.134,99.441 120.65,99.441 122.381,97.71 122.381,97.456 v1(122.428,97.409) 122.428,92.71 v1(118.999,89.281) 116.586,86.867 116.586,84.559 121.77,79.375 124.079,79.375 v1(124.081,79.377)
IMU_INT: TP40.1 U1.AD10 U2.12 | length 29.9
  Top Layer w0.254: U1.AD10 116.284,89.416 116.684,89.416 117.666,88.433 119.111,88.433 119.892,89.214 v1(119.892,89.281) ; U2.12 121.485,99.418 123.034,99.418 v1(123.037,99.415) ; v1(123.317,80.645) TP40.1
  Bottom Layer w0.254: v1(119.892,89.281) v1@119.959,89.281 ; v1(123.037,99.415) 123.063,99.389 123.063,92.452 119.959,89.348 v1@119.959,89.281 ; v1(123.317,80.645) 123.354,80.682 123.354,85.819 119.959,89.214 v1@119.959,89.281
LED: D1.2 TP8.1 U1.A10 | length 36.6
  Top Layer w0.127: D1.2 v1(103.759,101.219) ; U1.A10 109.323,89.878 105.855,89.878 105.64,89.662 v1(105.156,89.662) 104.775,89.281 104.775,86.72 110.49,81.005 TP8.1
  Bottom Layer w0.127: v1(103.759,101.219) 103.124,100.584 103.124,95.758 106.426,92.456 106.426,90.932 v1(105.156,89.662)
NetC1_1: C1.1 U1.A18 | length 1.4
  Top Layer w0.254: C1.1 108.671,91.026 109.385,91.026 U1.A18 U1.A18
NetC2_2: C2.2 C12.2 U1.B5 U1.E24 | length 10.6
  Top Layer w0.254: C2.2 108.6,89.027 v1(108.847,88.78) 109.457,88.17 U1.B5 ; C12.2@110.617,94.446 111.28,93.783 U1.E24
  Bottom Layer w0.254: v1(108.847,88.78) 110.109,90.043 110.109,94.184 v1(110.617,94.692)
NetC3_2: C3.2 L1.1 U1.H23 | length 2.7
  Top Layer w0.145: U1.H23 111.925,93.025 111.925,94.607 C3.2@112.04,94.722 ; C3.2@112.148,94.613 112.259,94.725 C3.2@112.264,94.73
  Top Layer w0.508: C3.2@112.259,94.725 L1.1@112.259,95.327
NetC5_1: C5.1 U1.A23 X1.3 | length 3
  Top Layer w0.254: C5.1 107.992,93.442 X1.3 108.62,92.92 U1.A23
NetC8_1: C8.1 U1.B24 X1.1 | length 4.3
  Top Layer w0.254: C8.1 107.662,95.858 108.275,95.245 108.275,94.569 108.27,94.565 108.27,94.342 109.192,93.42 U1.B24
NetC11_1: C11.1 U1.D23 | length 4.2
  Top Layer w0.254: C11.1 109.609,94.988 109.982,94.615 109.982,93.968 110.175,93.775 110.427,93.775 110.635,93.567 110.635,93.316 U1.D23
NetC14_2: C14.2 U1.N24 | length 1.3
  Top Layer w0.254: U1.N24 U1.N24 113.923,94.064 113.923,94.246 C14.2
NetC17_2: C17.2 U1.AC5 | length 3
  Top Layer w0.254: U1.AC5 115.78,88.164 115.885,88.06 115.885,87.314 116.586,86.613 C17.2
NetC21_2: C21.2 U2.20 | length 1.5
  Top Layer w0.254: C21.2 116.426,98.923 117.234,98.923 U2.20
NetC22_2: C22.2 U2.10 | length 1.1
  Top Layer w0.254: U2.10 121.78,98.422 122.39,98.422 C22.2
NetD1_1: D1.1 R2.2 | length 1.5
  Top Layer w0.127: D1.1 101.485,100.122 101.574,100.034 101.599,100.034 101.785,99.847 R2.2
NetP1_2: P1.2 U1.AA24 | length 70.7
  Top Layer w0.254: v1(102.743,78.486) 102.743,82.042 103.124,82.423 P1.2 ; U1.AA24 115.276,93.424 115.276,95.773 v1(115.285,96.531)
  Bottom Layer w0.254: v1(102.743,78.486) 102.743,76.708 103.632,75.819 117.983,75.819 119.793,77.629 125,77.629 125.603,78.232 125.603,80.189 124.079,81.713 124.079,100.181 122.914,101.346 116.967,101.346 115.285,99.664 v1(115.285,96.531)
NetP1_3: P1.3 U1.AD22 | length 26.5
  Top Layer w0.254: P1.3 v1(101.727,79.883) ; U1.AD22 117.179,92.42 117.314,92.555 v1(117.381,92.555)
  Bottom Layer w0.254: v1(101.727,79.883) 105.881,84.037 112.783,84.037 117.135,88.389 117.135,89.957 117.381,90.203 v1(117.381,92.555)
NetP1_4: P1.4 U1.AC24 | length 61.7
  Top Layer w0.254: P1.4 106.918,79.883 107.066,79.734 107.066,78.491 v1(107.061,78.486) ; U1.AC24 115.78,96.093 116.039,96.352 v1(116.039,96.409)
  Bottom Layer w0.254: v1(107.061,78.486) 107.061,76.708 107.606,76.163 117.692,76.163 119.602,78.073 124.555,78.073 125.222,78.74 125.222,80.01 123.698,81.534 123.698,100.076 122.809,100.965 117.094,100.965 116.039,99.91 v1(116.039,96.409)
NetP1_6: P1.6 U1.AC13 U1.AC15 U1.AC17 U1.AC19 U1.AC21 | length 32.6
  Top Layer w0.2: U1.AC13 U1.AC15 U1.AC17 U1.AC19 U1.AC21 115.78,92.883 117.131,94.234 v1(118.491,94.234)
  Top Layer w0.254: v1(104.902,78.486) 104.902,77.376 P1.6
  Bottom Layer w0.254: v1(104.902,78.486) 104.902,82.55 106.045,83.693 112.925,83.693 117.479,88.247 117.479,89.815 118.499,90.835 118.499,94.226 v1(118.491,94.234)
NetR5_1: R5.1 SW1.1 SW1.3
NetR6_1: R6.1 SW2.1 SW2.3 | length 7.5
  Top Layer w0.254: R6.1 R6.1@121.818,90.101 ; SW2.3 123.571,88.188 122.436,89.323 122.436,89.483 R6.1@121.818,90.101 ; SW2.1 123.571,92.971 122.301,91.701 122.301,90.584 R6.1@121.818,90.101
NetR7_1: R7.1 SW3.1 SW3.3 | length 8.5
  Top Layer w0.15: v1(108.585,76.794) R7.1
  Bottom Layer w0.15: v1(108.585,76.794) 108.68,76.794 108.921,77.035 109.555,77.035 SW3.3 SW3.1
NetSB1_1: SB1.1 SB2.2 U1.Y2 | length 15.1
  Top Layer w0.254: U1.Y2 115.03,87.414 115.951,86.493 115.951,77.089 116.84,76.2 117.594,76.2 SB1.1 118.215,76.208 118.364,76.357 118.364,77.059 118.513,77.208 SB2.2
NFC1: A1.2 CT1.1 CT3.1 U1.L24 | length 23.1
  Top Layer w0.127: U1.L24 113.157,93.797 113.157,95.504 113.956,96.303 113.956,98.896 116.93,101.87 122.92,101.87 123.698,101.092 124.918,101.092 125.553,100.457 CT1.1 125.653,100.457 126.056,100.86 127.173,100.86 127.577,100.457 CT3.1 A1.2
NFC2: A1.1 CT2.2 CT4.2 U1.J24 | length 23.2
  Top Layer w0.127: U1.J24 112.94,94.08 112.94,95.668 113.739,96.467 113.739,99.007 116.862,102.13 125.15,102.13 125.553,101.727 CT2.2 125.653,101.727 126.056,102.13 127.182,102.13 127.585,101.727 CT4.2 A1.1
P0.04: TP3.1 U1.J1 U1.L1 U1.N1 | length 13.4
  Top Layer w0.127: U1.J1 U1.L1 113.285,86.92 113.792,86.413 113.792,75.311 TP3.1
P0.12: TP37.1 U1.U1 | length 13.1
  Top Layer w0.127: U1.U1 114.276,86.916 114.276,77.494 TP37.1
P0.26: TP18.1 U1.G1 | length 13.6
  Top Layer w0.127: U1.G1 112.15,86.55 113.348,86.55 113.538,86.36 113.538,75.438 TP18.1
P0.31: TP29.1 U1.A8 | length 21.9
  Top Layer w0.127: U1.A8 109.106,89.594 105.977,89.594 105.029,88.646 105.029,86.773 111.76,80.042 TP29.1
P1.02: TP21.1 U1.W24 | length 22.7
  Top Layer w0.127: U1.W24 114.78,93.453 114.995,93.668 114.995,96.018 114.717,96.296 114.717,98.689 115.449,99.422 117.247,101.219 122.068,101.219 126.767,96.52 TP21.1
P1.04: TP23.1 U1.U24 | length 22.7
  Top Layer w0.127: U1.U24 114.778,93.918 114.778,95.928 114.5,96.206 114.5,98.827 117.11,101.436 122.158,101.436 125.804,97.79 TP23.1
P1.06: TP25.1 U1.R24 | length 22.9
  Top Layer w0.127: U1.R24 114.096,93.736 114.29,93.736 114.554,94.001 114.554,95.846 114.283,96.117 114.283,98.916 117.02,101.653 122.248,101.653 124.841,99.06 TP25.1
P1.09: TP35.1 U1.R1 | length 12.7
  Top Layer w0.127: U1.R1 114.046,86.654 114.046,76.327 TP35.1
P1.10: TP27.1 U1.A20 | length 13.2
  Top Layer w0.127: TP27.1 100.864,88.9 101.118,89.154 v1(101.219,89.154) ; v1(105.793,91.44) 109.3,91.44 U1.A20
  Bottom Layer w0.127: v1(101.219,89.154) 101.272,89.154 103.558,91.44 v1(105.793,91.44)
RF: C4.2 C25.2 L1.2 R1.1 | length 7.2
  Top Layer w0.889: 108.026,100.406 108.026,99.949 108.026,99.543 ccw(c109.55,99.543) 109.55,98.019 110.744,98.019 cw(c110.744,96.495) 112.268,96.495 L1.2@112.268,96.139
SCL: R3.1 TP2.1 U1.AD18 U2.23 U3.4 | length 38.5
  Top Layer w0.15: v1(123.067,89.662) 124.46,89.662 v1(125.73,88.392) ; U3.4 127.383,86.009 127.54,85.852 v1(127.635,85.852)
  Top Layer w0.254: U1.AD18 116.286,91.42 116.306,91.44 120.394,91.44 ; v1(116.801,96.283) 116.801,97.097 117.077,97.373 117.484,97.373 U2.23 ; v1(120.394,94.74) 120.394,91.44 ; v1@121.114,89.077 120.867,89.325 120.867,90.967 120.394,91.44 ; v1@121.158,89.027 121.158,88.96 121.412,88.706 121.412,87.515 R3.1 121.4,87.403 120.65,86.653 120.65,80.645 TP2.1
  Bottom Layer w0.15: v1(121.161,89.03) 121.793,89.662 v1(123.067,89.662) ; v1(125.73,88.392) 125.73,86.741 126.365,86.106 127.372,86.106 127.626,85.852 v1(127.635,85.852)
  Bottom Layer w0.254: v1(116.801,96.283) 116.801,96.234 117.658,95.377 119.761,95.377 120.394,94.744 v1(120.394,94.74)
SDA: R4.1 TP1.1 U1.AD20 U2.24 U3.3 | length 37.4
  Top Layer w0.15: R4.1 122.047,85.471 123.444,86.868 125.56,86.868 126.282,86.146 126.282,85.875 126.798,85.359 U3.3
  Top Layer w0.254: U1.AD20 119.482,91.92 119.761,92.199 119.761,95.377 ; U2.24 117.532,95.828 117.983,95.377 119.761,95.377 ; TP1.1 121.388,81.177 R4.1 121.611,85.694 121.611,86.178 122.017,86.584 122.017,89.082 121.211,89.888 121.211,92.352 121.162,92.401 121.162,94.865 120.65,95.377 119.761,95.377
VBUS: C19.2 SB2.1 TP34.1 U1.AD2 | length 17.2
  Top Layer w0.254: U1.AD2 116.284,87.416 116.654,87.416 118.144,85.926 ; C19.2 117.754,85.511 118.149,85.906 118.164,85.906 118.583,85.487 118.583,79.156 120.724,77.015 TP34.1@120.724,74.983 ; SB2.1 119.499,76.208 TP34.1@120.724,74.983 ; TP34.1 TP34.1@120.724,74.983
VCC_nRF: BT?.2 C6.2 C7.2 C15.2 C18.2 C20.2 P1.1 pad.2@119.761,85.09 SB1.2 TP9.1 U1.A22 U1.AD14 U1.AD23 U1.B1 U1.W1 | length 18.3
  Top Layer w0.254: P1.1 99.662,82.296 v1(101.727,82.296) ; v1(107.315,85.344) 107.351,85.38 107.351,85.975 107.79,86.413 108.068,86.413 108.625,86.97 C6.2 108.7,86.92 U1.B1 ; C7.2 109.008,91.948 109.476,92.416 109.776,92.416 U1.A22 ; U1.W1 115.189,86.511 C15.2 115.164,85.511 114.557,84.904 114.557,83.63 114.935,83.252 v1(114.935,83.185) ; U1.AD14 117.056,90.42 117.306,90.17 117.406,90.17 118.16,89.416 v1(118.168,89.416) ; U1.AD23 116.804,92.92 117.183,93.299 117.183,93.349 117.306,93.472 C18.2 117.406,93.472 117.529,93.349 117.529,93.299 118.245,92.583 v1(119.13,92.583) ; SB1.2 v1(117.602,78.105)
  other v1: 119.38,74.93
XL1: C10.2 U1.D2 X2.2 | length 4.6
  Top Layer w0.127: C10.2 108.077,84.894 108.527,85.344 X2.2 109.855,85.344 111.071,86.56 111.071,87.274 111.058,87.287 111.058,87.392 U1.D2
XL2: C13.2 U1.F2 X2.1 | length 4.8
  Top Layer w0.127: U1.F2 111.53,87.082 111.288,86.84 111.288,86.47 110.617,85.799 110.617,85.598 110.871,85.344 X2.1 112.453,85.344 112.903,84.894 C13.2
pads on no net: U1.AB2 U1.AC9 U1.AC11 U1.B3 U1.B9 U1.B11 U1.B13 U1.B15 U1.B17 U1.B19 U1.H2 U1.K2 U1.M2 U1.P2 U1.P23 U1.T2 U1.T23 U1.V23 U1.Y23 U2.2 U2.3 U2.4 U2.5 U2.6 U2.7 U2.9 U2.14 U2.15 U2.16 U2.17 U2.19 U2.21 U2.22

## Polygon pours and split planes (outlines as drawn)
GND on Layer 1 "NONET_L02_P000" (solid, shelved, pour order 0): 96.52,80.137 96.52,101.473 cw(c102.616,101.473) 102.616,107.569 123.952,107.569 cw(c123.952,101.473) 130.048,101.473 130.048,91.44 129.032,91.44 129.032,90.17 130.048,90.17 130.048,80.137 cw(c123.952,80.137) 123.952,74.041 102.616,74.041 cw(c102.616,80.137)
VCC_nRF on Layer 2 "NONET_L03_P001" (solid, shelved, pour order 1): 96.52,80.137 96.52,101.473 cw(c102.616,101.473) 102.616,107.569 123.952,107.569 cw(c123.952,101.473) 130.048,101.473 130.048,91.44 129.032,91.44 129.032,90.17 130.048,90.17 130.048,80.137 cw(c123.952,80.137) 123.952,74.041 102.616,74.041 cw(c102.616,80.137)

## Other copper
Top Layer:
  pour cut-out: 125.222,87.249 125.222,82.804 130.048,82.804 130.048,87.249
  pour cut-out: 113.355,96.246 113.355,93.502 111.062,93.502 111.062,96.246
  pour cut-out: 110.465,97.46 107.02,97.46 107.02,93.343 110.465,93.343
  pour cut-out: 105.613,100.664 105.613,97.406 107.994,97.406 107.994,100.664
  pour cut-out: 130.429,107.998 130.429,102.235 96.266,102.235 96.266,107.998

## Silkscreen, mask and mechanical layers (free items; w line width, h text height)
Top Overlay:
  circle w0.254: c124.079,79.883 r4.064
  circle w0.254: c124.206,101.6 r4.064
  circle w0.254: c102.489,101.727 r4.064
Mechanical 1:
  lines w0.254: 96.52,80.137 96.52,74.041 102.616,74.041 ; 96.52,101.473 96.52,107.569 102.616,107.569 ; 123.952,74.041 130.048,74.041 130.048,80.137 ; 123.952,107.569 130.048,107.569 130.048,101.473
Mechanical 7:
  circle w0.254: c102.362,80.01 r4.064
  lines w0.254: 108.585,93.408 108.585,94.014 108.585,107.505 ; 129.921,85.09 124.481,85.09 123.931,85.09 119.761,85.09 119.761,74.295 120.015,74.041 ; 96.52,93.345 96.52,80.137 ccw(c102.616,80.137) 102.616,74.041 120.015,74.041 ; 96.52,93.345 96.52,101.473 cw(c102.616,101.473) 102.616,107.569 108.585,107.569 115.57,107.569 ; 96.52,93.345 115.57,93.472 115.57,93.67 115.57,107.569 ; 115.57,107.569 123.952,107.569 cw(c123.952,101.473) 130.048,101.473 130.048,91.44 129.032,91.44 129.032,90.17 130.048,90.17 130.048,85.09 130.048,80.137 cw(c123.952,80.137) 123.952,74.041 120.015,74.041